# EAGLE board PCB 2D  (EAGLE 9.7.0)
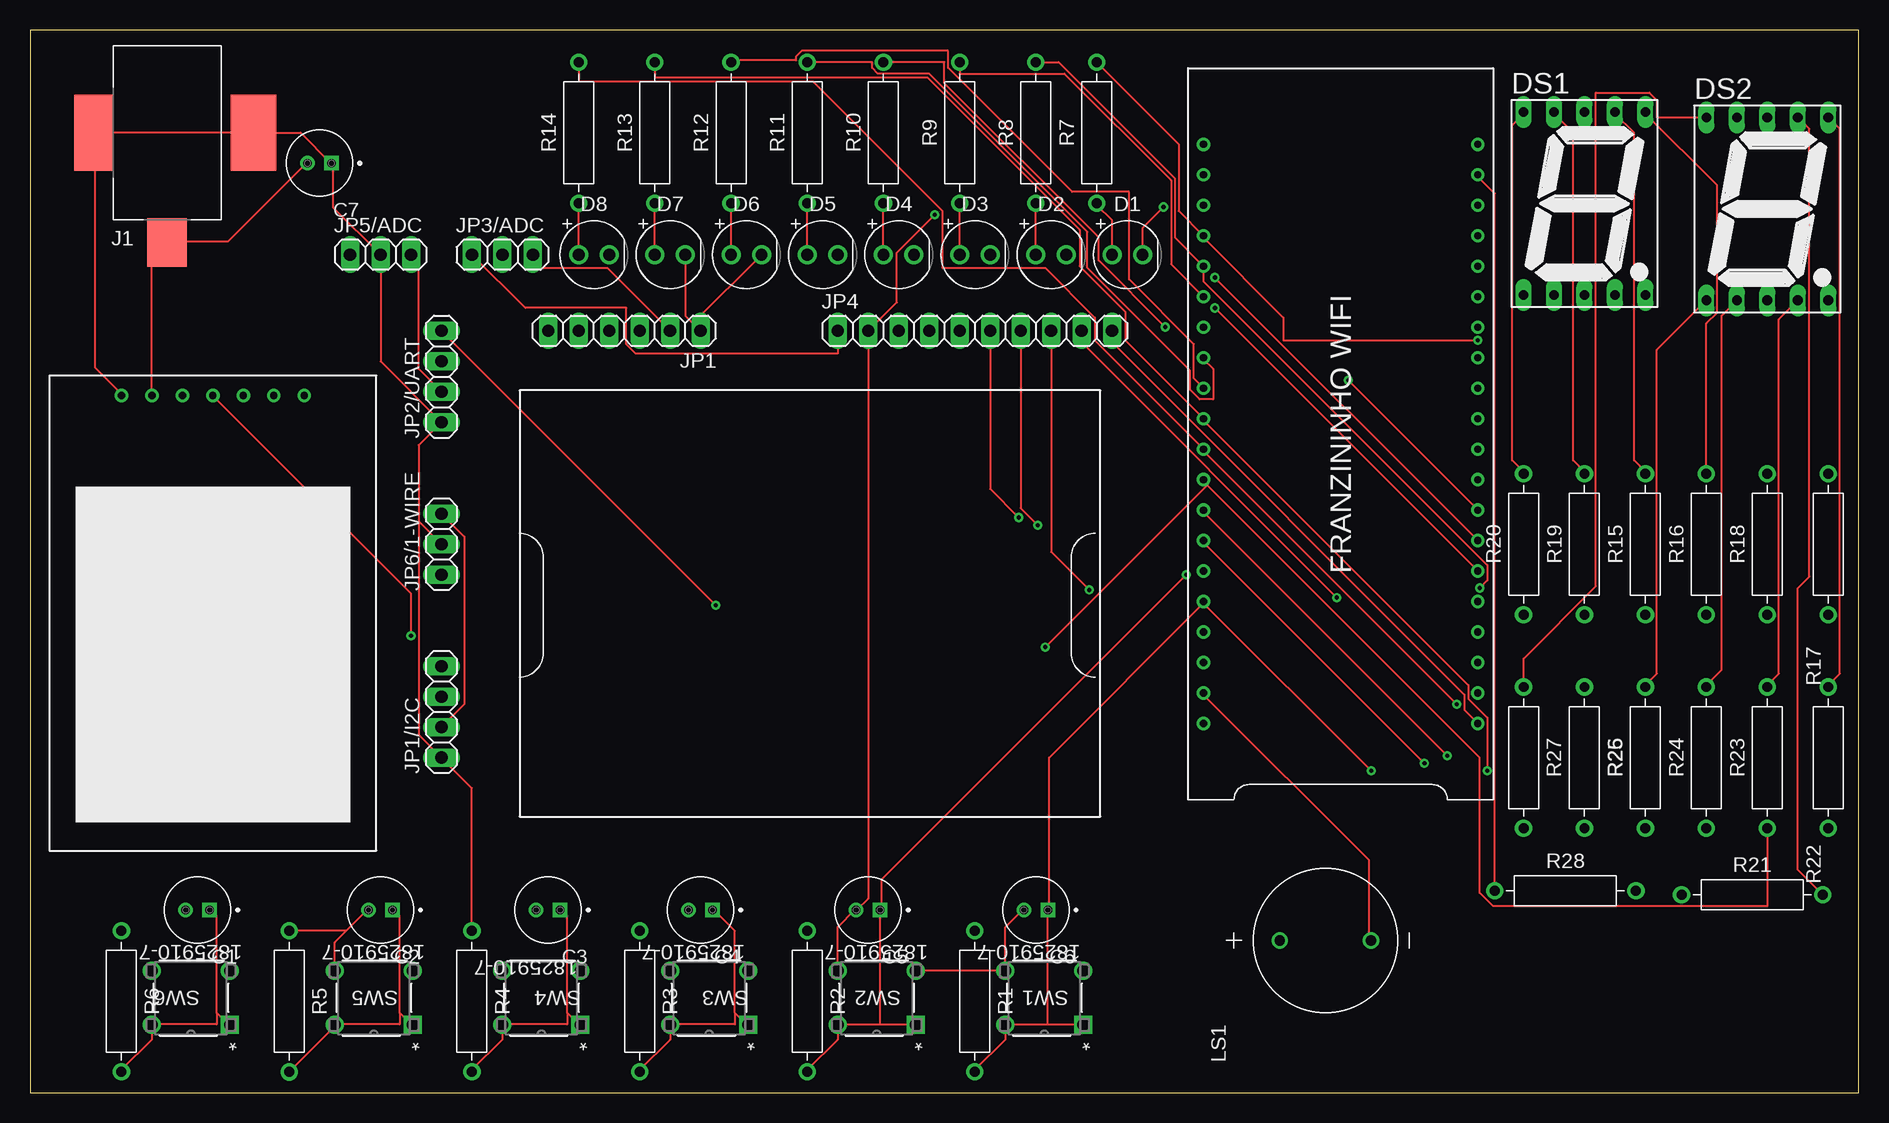
[diagram p0: board, top side]
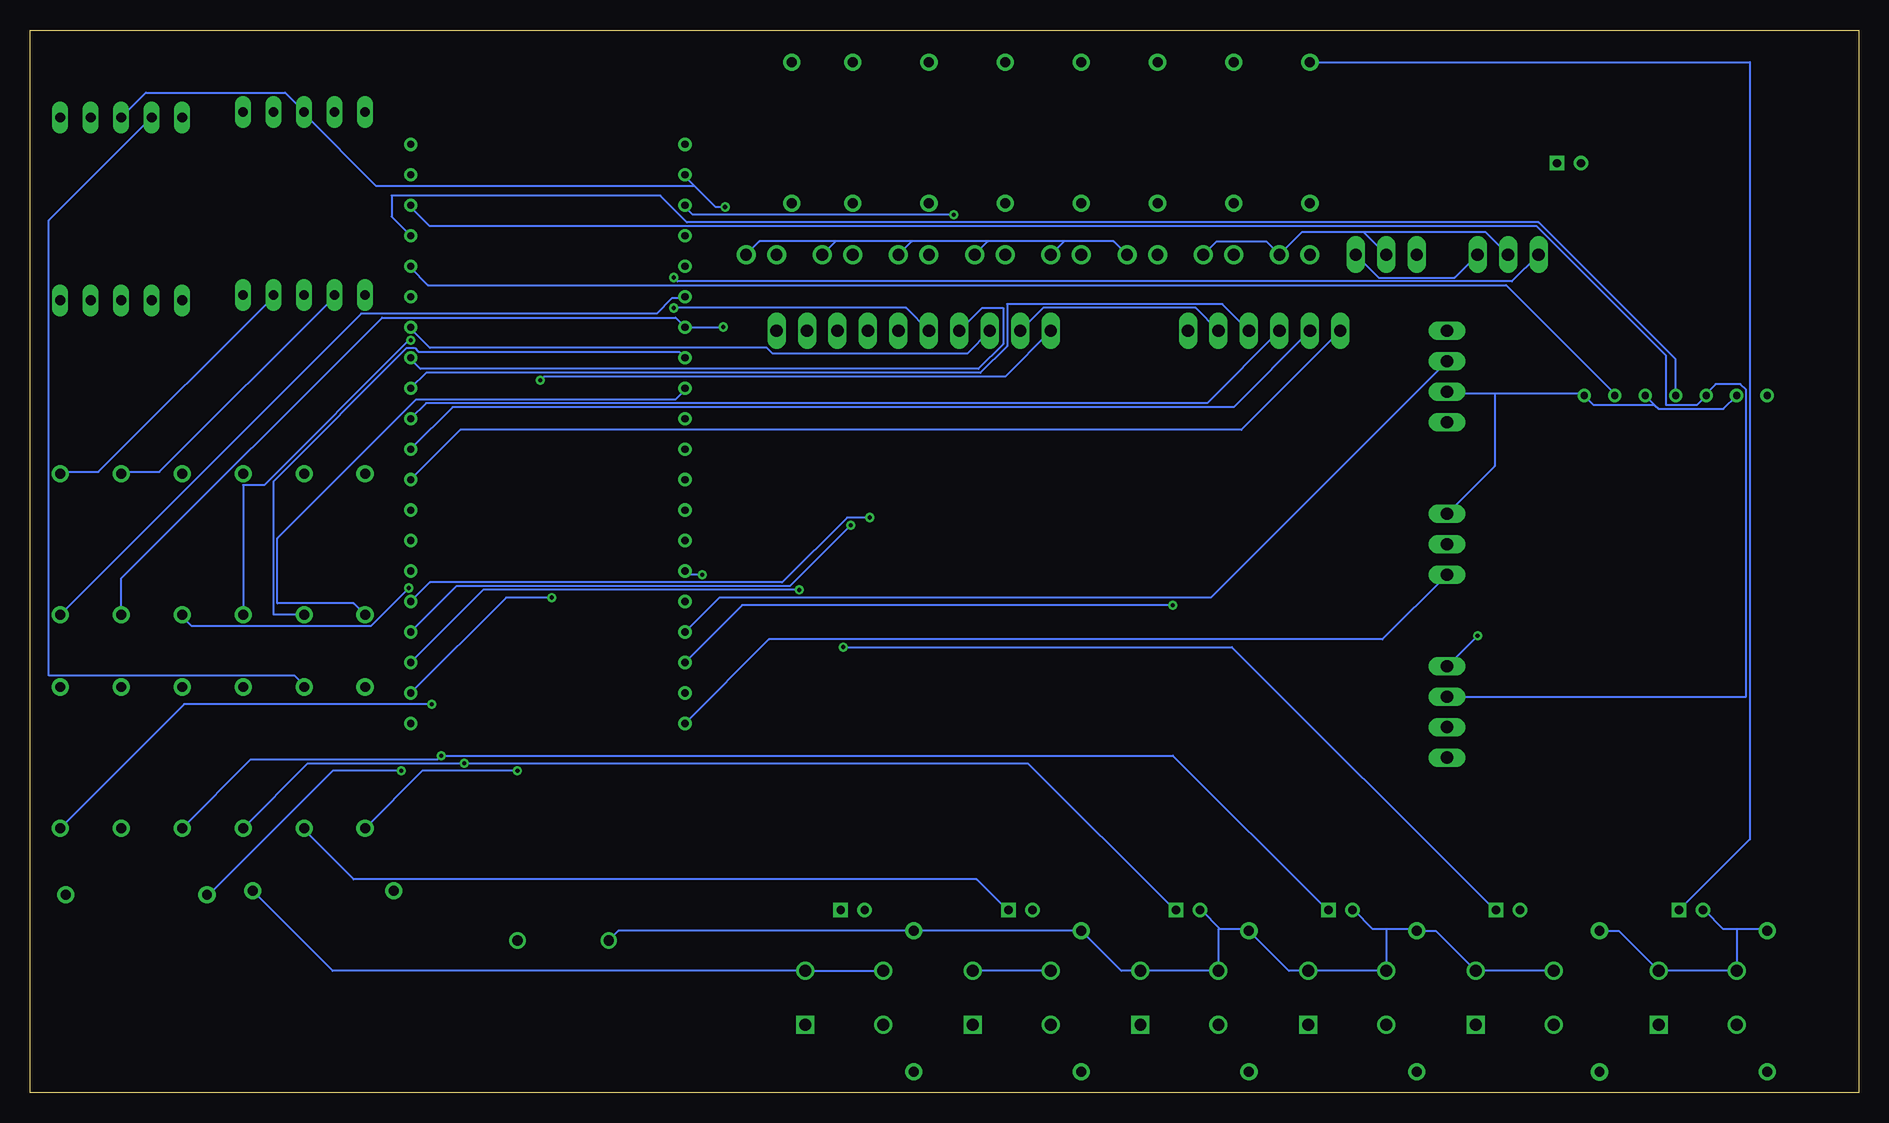
[diagram p1: board, bottom side, seen from below]

Size 152.38 x 88.57 mm. Coordinates in mm from the lower left corner, seen from the top.
Outline: 0,0 152.38,0 152.38,88.57 0,88.57 0,0
Copper layers (1*16): Top / Bottom
Stack-up Default Layer Stack: Top User Defined 0.035mm / Dielectric-1 User Defined 1.5mm / Bottom User Defined 0.035mm
Design rules "default": minimum track width 6mil, minimum drill 0.35mm, track to track 6mil, track to pad 6mil, pad to pad 6mil, via to via 6mil, smd to smd 6mil, copper to edge 40mil, drill to drill 6mil, minimum pad ring 10mil, minimum via ring 8mil, stop-mask expansion 4mil, vias tented up to drill 0mil, thermal gap 10mil

## Footprints (pad centres in the part's own frame; a part is rotated, then mirrored left to right if it is on the bottom)
CAP_RADIAL_2MM = drill 0.7 pad 1.1 square: 1 -1,0 | drill 0.7 pad 1.1: 2 1,0
LEDRD254W60D565H860B_G = drill 0.981 pad 1.581: 1 -1.27,0; 2 1.27,0
7SEG-13 = drill 0.813 long: 1 -5.08,-7.62; 2 -2.54,-7.62; 3 0,-7.62; 4 2.54,-7.62; 5 5.08,-7.62; 6 5.08,7.62; 7 2.54,7.62; 8 0,7.62; 9 -2.54,7.62; 10 -5.08,7.62
RASM722X = smd 3.3 x 4.06: PIN 0,9.14 | smd 3.3 x 6.35: SHUNT 6.1,0 | smd 3.81 x 6.35: SLEEVE -7.19,0
1X06 = drill 1.016 long: 1 -6.35,0; 2 -3.81,0; 3 -1.27,0; 4 1.27,0; 5 3.81,0; 6 6.35,0
1X04 = drill 1.016 long: 1 -3.81,0; 2 -1.27,0; 3 1.27,0; 4 3.81,0
1X03 = drill 1.016 long: 1 -2.54,0; 2 0,0; 3 2.54,0
1X10 = drill 1.016 long: 1 -11.43,0; 2 -8.89,0; 3 -6.35,0; 4 -3.81,0; 5 -1.27,0; 6 1.27,0; 7 3.81,0; 8 6.35,0; 9 8.89,0; 10 11.43,0
XDCR_AI-1223-TWT-12V-R = drill 0.85: N 0,-3.8; P 0,3.8
RESAD1176W63L850D250B = drill 0.83 pad 1.43: 1 -5.88,0; 2 5.88,0
SW4_1825910-B = drill 0.991 pad 1.499 square: 1 -6.502,4.496 | drill 0.991 pad 1.499: 2 0,4.496; 3 -6.502,0; 4 0,0
FRANZININHO-FOOTPRINT = drill 0.6: 3V3 -5.08,-16.51; 5V 17.78,-13.97; GND -5.08,-19.05; GND1 17.78,-19.05; GND2 17.78,-16.51; GPIO0 -5.08,29.21; GPIO1 -5.08,26.67; GPIO2 -5.08,24.13; GPIO3 -5.08,21.59; GPIO4 -5.08,19.05; GPIO5 -5.08,16.51; GPIO6 -5.08,13.97; GPIO7 -5.08,11.43; GPIO8 -5.08,-11.43; GPIO9 -5.08,-13.97; GPIO10 -5.08,8.89; GPIO11 -5.08,6.35; GPIO12 -5.08,3.81; GPIO13 -5.08,1.27; GPIO14 -5.08,-1.27; GPIO15 -5.08,-3.81; GPIO16 -5.08,-6.35; GPIO17 -5.08,-8.89; GPIO18 17.78,-11.43; GPIO21 17.78,-8.89; GPIO26 17.78,-6.35; GPIO33 17.78,-3.81; GPIO34 17.78,-1.27; GPIO35 17.78,1.27; GPIO36 17.78,3.81; GPIO37 17.78,6.35; GPIO38 17.78,8.89; GPIO39 17.78,11.43; GPIO40 17.78,13.97; GPIO41 17.78,16.51; GPIO42 17.78,19.05; GPIO43 17.78,21.59; GPIO44 17.78,24.13; GPIO45 17.78,26.67; GPIO46 17.78,29.21
LED-TFT-FOOTPRINT = drill 0.6: BLK 7.62,17.78; DC 5.08,17.78; GND -7.62,17.78; RES 2.54,17.78; SCL -2.54,17.78; SDA 0,17.78; VCC -5.08,17.78

## Placement (x,y rotation side)
C1  0.1uF  [CAP_RADIAL_2MM]  13.97,15.24 180 top
C2  0.1uF  [CAP_RADIAL_2MM]  29.21,15.24 180 top
C3  0.1uF  [CAP_RADIAL_2MM]  43.18,15.24 180 top
C4  0.1uF  [CAP_RADIAL_2MM]  55.88,15.24 180 top
C5  0.1uF  [CAP_RADIAL_2MM]  69.85,15.24 180 top
C6  0.1uF  [CAP_RADIAL_2MM]  83.82,15.24 180 top
C7  0.1uF  [CAP_RADIAL_2MM]  24.13,77.47 180 top
D1  [LEDRD254W60D565H860B_G]  91.44,69.85 0 top
D2  [LEDRD254W60D565H860B_G]  85.09,69.85 0 top
D3  [LEDRD254W60D565H860B_G]  78.74,69.85 0 top
D4  [LEDRD254W60D565H860B_G]  72.39,69.85 0 top
D5  [LEDRD254W60D565H860B_G]  66.04,69.85 0 top
D6  [LEDRD254W60D565H860B_G]  59.69,69.85 0 top
D7  [LEDRD254W60D565H860B_G]  53.34,69.85 0 top
D8  [LEDRD254W60D565H860B_G]  46.99,69.85 0 top
DS1  7SEG-CA  [7SEG-13]  129.54,74.11 0 top
DS2  7SEG-CA  [7SEG-13]  144.78,73.66 0 top
J1  RASM722  [RASM722X]  11.43,80.01 180 top
JP1  PINHD-1X6  [1X06]  49.53,63.5 180 top
JP1/I2C  PINHD-1X4  [1X04]  34.29,31.75 90 top
JP2/UART  PINHD-1X4  [1X04]  34.29,59.69 90 top
JP3/ADC  PINHD-1X3  [1X03]  39.37,69.85 0 top
JP4  PINHD-1X10  [1X10]  78.74,63.5 0 top
JP5/ADC  PINHD-1X3  [1X03]  29.21,69.85 0 top
JP6/1-WIRE  PINHD-1X3  [1X03]  34.29,45.72 90 top
LS1  AI-1223-TWT-12V-R  [XDCR_AI-1223-TWT-12V-R]  107.95,12.7 90 top
R1  10k  [RESAD1176W63L850D250B]  78.74,7.63 270 top
R2  10k  [RESAD1176W63L850D250B]  64.77,7.63 270 top
R3  10k  [RESAD1176W63L850D250B]  50.8,7.63 270 top
R4  10k  [RESAD1176W63L850D250B]  36.83,7.63 270 top
R5  10k  [RESAD1176W63L850D250B]  21.59,7.62 270 top
R6  10k  [RESAD1176W63L850D250B]  7.62,7.63 270 top
R7  160  [RESAD1176W63L850D250B]  88.9,80.01 90 top
R8  160  [RESAD1176W63L850D250B]  83.82,80.01 90 top
R9  160  [RESAD1176W63L850D250B]  77.47,80.01 90 top
R10  160  [RESAD1176W63L850D250B]  71.12,80.01 90 top
R11  160  [RESAD1176W63L850D250B]  64.77,80.01 90 top
R12  160  [RESAD1176W63L850D250B]  58.42,80.01 90 top
R13  160  [RESAD1176W63L850D250B]  52.07,80.01 90 top
R14  160  [RESAD1176W63L850D250B]  45.72,80.01 90 top
R15  200  [RESAD1176W63L850D250B]  134.62,45.72 90 top
R16  200  [RESAD1176W63L850D250B]  139.7,45.72 90 top
R17  200  [RESAD1176W63L850D250B]  149.86,45.72 90 top
R18  200  [RESAD1176W63L850D250B]  144.78,45.72 90 top
R19  200  [RESAD1176W63L850D250B]  129.54,45.72 90 top
R20  200  [RESAD1176W63L850D250B]  124.46,45.72 90 top
R21  200  [RESAD1176W63L850D250B]  143.51,16.51 0 top
R22  200  [RESAD1176W63L850D250B]  149.86,27.94 90 top
R23  200  [RESAD1176W63L850D250B]  144.78,27.94 90 top
R24  200  [RESAD1176W63L850D250B]  139.7,27.94 90 top
R25  200  [RESAD1176W63L850D250B]  134.62,27.94 90 top
R26  200  [RESAD1176W63L850D250B]  129.54,27.94 270 top
R27  200  [RESAD1176W63L850D250B]  124.46,27.94 270 top
R28  1k  [RESAD1176W63L850D250B]  127.95,16.83 0 top
SW1  1825910-7  [SW4_1825910-B]  81.28,10.16 180 top
SW2  1825910-7  [SW4_1825910-B]  67.31,10.16 180 top
SW3  1825910-7  [SW4_1825910-B]  53.34,10.16 180 top
SW4  1825910-7  [SW4_1825910-B]  39.37,10.16 180 top
SW5  1825910-7  [SW4_1825910-B]  25.4,10.16 180 top
SW6  1825910-7  [SW4_1825910-B]  10.16,10.16 180 top
U$1  FRANZININHO  [FRANZININHO-FOOTPRINT]  115.57,59.99 180 top
U$2  LCD-TFT-1.3-240X240  [LED-TFT-FOOTPRINT]  15.24,40.34 0 top
U$3  PROTOBOARD170  [PROTOBOARD170-FOOTPRINT]  64.77,40.64 90 top

## Library data of the parts
C1-C7 = Resistor_Capacitor; CREATED_BY: PCBLayout.com; DIGIKEY_PART_NUMBER: P5175-ND; MANUFACTURER: Panasonic Electronic Components; MPN: ECA-1HM2R2; PACKAGE: CAP RADIAL 2MM LS
D1-D8 = Library
DS1 DS2 = Opto-Electronic; CATEGORY: Opto-Electronic; SUB-CATEGORY: Display; TYPE: 7-Segment
J1 = Connector; CREATED_BY: PCBLayout.com; DIGI-KEY_PART_NO: RASM722X-ND; MANUFACTURER: Switchcraft Inc.; MPN: RASM722X
JP1 JP1/I2C JP2/UART JP3/ADC JP4 JP5/ADC JP6/1-WIRE = Connector; CATEGORY: CONNECTOR; SUB-CATEGORY: PIN-HEADER
LS1 = AI-1223-TWT-12V-R; MANUFACTURER: PUI Audio; MAXIMUM_PACKAGE_HEIGHT: 9.7 mm; PARTREV: F; STANDARD: IPC 7351B
R1-R28 = Tutorial - Fusion 360; CATEGORY: Resistor; SUB-CATEGORY: Fixed
SW1-SW6 = Switches; BUILT_BY: EMA_UL_Team; CATEGORY: Tactile Switches; CONFIGURATION__POLE-THROW_: Single Pole - Single Throw; COPYRIGHT: Copyright (C) 2016 Accelerated Designs. All rights reserved; DESCRIPTION: FSM4JAH=6MM TACT SWITCH, HIGH TEMP; MANUFACTURER_PART_NUMBER: 1825910-7; MAX_SWITCHING_CURRENT: -; MAX_SWITCHING_VOLTAGE_AC_: -; PART_STATUS: active; PRODUCT_TYPE: Switch; SERIES: Unknown; SWITCH_TYPE: Tactile Switches; TE_PART_NUMBER: 1825910-7; VENDOR: TE Connectivity
U$1 = Franzininho Library
U$2 = LCD Library
U$3 = Protoboard Library

## Nets
GND: C1.2 C2.2 C3.2 C4.2 C7.1 D1.2 D2.2 D3.2 D4.2 D5.2 D6.2 D7.2 D8.2 DS1.8 DS2.8 J1.SHUNT J1.SLEEVE JP1.1 JP1/I2C.1 JP2/UART.1 JP3/ADC.2 JP5/ADC.2 JP6/1-WIRE.2 LS1.P R1.1 R2.1 R3.1 R4.1 R5.1 R6.1 SW3.3 SW3.4 SW4.3 SW4.4 SW5.3 SW5.4 SW6.3 SW6.4 U$1.GND2 U$2.GND
N$1: JP2/UART.4 U$1.GPIO44
N$2: JP2/UART.3 U$1.GPIO43
N$3: D1.1 R7.1
N$4: JP1.6 U$1.GPIO10
N$5: D2.1 R8.1
N$6: JP6/1-WIRE.1 U$1.GPIO46
N$7: JP1/I2C.3 U$1.GPIO9 U$2.SCL
N$8: D3.1 R9.1
N$9: DS2.7 R21.2
N$10: JP1.5 U$1.GPIO11
N$11: JP1.4 U$1.GPIO12
N$12: JP1.3 U$1.GPIO13
N$13: JP5/ADC.1 U$1.GPIO6
N$14: JP3/ADC.1 JP4.1 U$1.GPIO7
N$15: C6.1 R1.2 R27.2 SW1.1 SW1.2 U$1.GPIO42
N$16: D4.1 R10.1
N$17: C4.1 R3.2 R25.1 SW3.1 SW3.2 U$1.GPIO40
N$18: R7.2 R15.1 U$1.GPIO18
N$19: C3.1 R4.2 R24.1 SW4.1 SW4.2 U$1.GPIO39
N$20: R8.2 R16.1 U$1.GPIO21
N$21: C2.1 R5.2 R23.1 SW5.1 SW5.2 U$1.GPIO38
N$22: R9.2 R17.1 U$1.GPIO26
N$23: C1.1 R6.2 R14.2 R22.1 SW6.1 SW6.2 U$1.GPIO37
N$24: R10.2 R18.1 U$1.GPIO33
N$25: R11.2 R19.1 U$1.GPIO34
N$26: R12.2 R20.1 U$1.GPIO35
N$27: R13.2 R21.1 U$1.GPIO36
N$28: C5.2 C6.2 C7.2 J1.PIN JP1.2 JP1/I2C.2 JP2/UART.2 JP3/ADC.3 JP4.2 JP5/ADC.3 JP6/1-WIRE.3 R28.2 SW1.3 SW1.4 SW2.3 SW2.4 U$1.5V U$2.BLK U$2.RES U$2.VCC
N$29: D5.1 R11.1
N$30: D6.1 R12.1
N$31: D7.1 R13.1
N$32: D8.1 R14.1
N$33: C5.1 R2.2 R26.2 SW2.1 SW2.2 U$1.GPIO41
N$34: DS1.7 R15.2
N$35: DS1.6 R16.2
N$36: DS1.4 R17.2
N$37: DS1.2 R18.2
N$38: U$1.GPIO17 U$2.DC
N$39: JP1/I2C.4 U$1.GPIO8 U$2.SDA
N$40: DS1.9 R19.2
N$41: JP4.6 U$1.GPIO4
N$42: DS1.10 R20.2
N$43: DS2.6 R22.2
N$44: DS2.4 R23.2
N$45: DS2.2 R24.2
N$46: DS2.1 R25.2
N$47: DS2.9 R26.1
N$48: DS2.10 R27.1
N$49: LS1.N U$1.GPIO45
N$50: JP4.10 U$1.GPIO0
N$51: JP4.9 U$1.GPIO1
N$52: JP4.8 U$1.GPIO2
N$53: JP4.7 U$1.GPIO3
N$54: JP4.5 U$1.GPIO5
N$55: JP4.4 U$1.GPIO14
N$56: JP4.3 U$1.GPIO15
N$57: R28.1 U$1.3V3

## Tracks (layer width: path | path; a pad name or v marks a point on that pad's centre or on a via)
GND  (via drill 0.35)
  Top 0.152: 26.35,13.49 25.4,12.54 SW5.4 | 26.35,13.49 28.1,15.24 C2.2 | 26.35,13.49 R5.1 | R4.1 36.83,25.4 JP1/I2C.1 32.39,29.85 32.39,47.62 | 5.4,80.01 5.4,60.48 7.62,58.26 U$2.GND | 32.39,47.62 JP6/1-WIRE.2 | 32.39,47.62 32.39,53.98 JP2/UART.1 29.21,60.96 JP5/ADC.2 25.24,73.82 25.24,77.47 C7.1 25.08,77.47 22.54,80.01 J1.SLEEVE 5.4,80.01 | 5.4,80.01 J1.SHUNT | v94.46,73.82 92.71,72.07 D1.2 | 55.24,64.14 54.61,64.77 D7.2 | 55.24,64.14 D6.2 | 55.24,64.14 JP1.1
  Bottom 0.152: 10.16,13.65 7.62,13.65 R6.1 | 10.16,13.65 11.27,13.65 12.86,15.24 C1.2 | 10.16,13.65 SW6.4 SW6.3 20,13.49 R5.1 | SW5.4 SW5.3 35.24,13.49 36.83,13.49 R4.1 36.83,13.65 39.37,13.65 | 78.74,13.49 103.35,13.49 LS1.P | 64.77,13.49 61.44,10.16 SW3.3 SW3.4 53.34,13.65 53.18,13.65 | 53.18,13.65 54.77,15.24 C4.2 | 53.18,13.65 50.8,13.65 R3.1 50.8,13.49 47.47,10.16 SW4.3 SW4.4 39.37,13.65 | 39.37,13.65 40.48,13.65 42.07,15.24 C3.2 | 64.77,13.49 78.74,13.49 | 78.74,13.49 R1.1 | 64.77,13.49 R2.1 | DS2.8 142.72,83.34 131.13,83.34 129.54,81.76 DS1.8 129.54,81.6 123.51,75.56 97,75.56 | 97,75.56 95.25,73.82 v94.46,73.82 | 97,75.56 97.79,76.36 U$1.GND2 | 41.28,71.75 JP3/ADC.2 | 41.28,71.75 46.36,71.75 D8.2 49.37,70.96 53.5,70.96 D7.2 | 66.2,70.96 D5.2 | 66.2,70.96 62.07,70.96 D6.2 | 72.55,70.96 D4.2 | 66.2,70.96 72.55,70.96 | 78.9,70.96 D3.2 | 72.55,70.96 78.9,70.96 | 85.25,70.96 D2.2 | 78.9,70.96 85.25,70.96 | D1.2 91.6,70.96 85.25,70.96 | JP5/ADC.2 31.11,71.75 41.28,71.75
N$1  (via drill 0.35)
  Top 0.152: JP2/UART.4 v57.15,40.64
  Bottom 0.152: v57.15,40.64 93.03,40.64 97.79,35.88 U$1.GPIO44
N$2
  Bottom 0.152: JP2/UART.3 53.97,41.28 94.93,41.28 97.79,38.42 U$1.GPIO43
N$3
  Top 0.152: D1.1 90.17,72.71 88.9,73.98 R7.1
N$4
  Bottom 0.152: JP1.6 51.44,55.25 116.52,55.25 120.65,51.12 U$1.GPIO10
N$5
  Top 0.152: D2.1 R8.1
N$6
  Bottom 0.152: JP6/1-WIRE.1 39.69,37.78 90.8,37.78 97.79,30.8 U$1.GPIO46
N$7
  Bottom 0.152: JP1/I2C.3 9.37,33.02 9.37,58.58 9.84,59.05 11.91,59.05 12.7,58.26 U$2.SCL 12.7,58.1 13.49,57.31 16.03,57.31 16.03,61.44 26.83,72.23 119.06,72.23 120.65,73.82 U$1.GPIO9
N$8
  Top 0.152: D3.1 R9.1
N$9
  Top 0.152: DS2.7 148.27,80.33 148.27,43.02 147.32,42.07 147.32,18.57 R21.2
N$10
  Bottom 0.152: JP1.5 52.07,57.15 117.16,57.15 120.65,53.66 U$1.GPIO11
N$11
  Bottom 0.152: JP1.4 54.29,57.47 119.38,57.47 120.65,56.2 U$1.GPIO12
N$12
  Bottom 0.152: JP1.3 53.02,65.72 70.96,65.72 70.96,62.23 73.18,60.01 119.38,60.01 120.65,58.74 U$1.GPIO13
N$13  (via drill 0.35)
  Top 0.152: v98.74,67.95 120.65,46.04 U$1.GPIO6
  Bottom 0.152: v98.74,67.95 98.42,67.63 28.89,67.63 JP5/ADC.1
N$14  (via drill 0.35)
  Top 0.152: v109.86,59.37 120.65,48.58 U$1.GPIO7 | JP3/ADC.1 41.28,65.41 49.69,65.41 49.69,62.39 50.48,61.59 67.31,61.59 JP4.1
  Bottom 0.152: v109.86,59.37 109.54,59.69 71.12,59.69 JP4.1
N$15  (via drill 0.35)
  Top 0.152: R1.2 78.74,1.91 81.28,4.45 SW1.2 81.28,5.72 84.77,5.72 | 84.77,5.72 87.63,5.72 SW1.1 | 97.79,40.8 84.93,27.94 84.93,15.24 C6.1 84.77,15.24 84.77,5.72 | 97.79,40.8 v111.76,26.83 | 97.79,40.8 U$1.GPIO42
  Bottom 0.152: v111.76,26.83 119.7,26.83 R27.2
N$16
  Top 0.152: D4.1 R10.1
N$17  (via drill 0.35)
  Top 0.152: R3.2 50.8,1.91 53.34,4.45 SW3.2 53.34,5.72 58.74,5.72 58.74,6.67 | 58.74,6.67 58.74,13.49 56.99,15.24 C4.1 | 58.74,6.67 59.69,5.72 SW3.1 | v116.2,27.46 97.79,45.88 U$1.GPIO40
  Bottom 0.152: R25.1 129.22,27.46 v116.2,27.46 69.22,27.46 56.99,15.24 C4.1
N$18  (via drill 0.35)
  Top 0.152: R7.2 95.73,79.06 95.73,73.5 97.79,71.44 U$1.GPIO18 97.79,71.28 104.46,64.61 104.46,62.71 v120.65,62.71
  Bottom 0.152: R15.1 134.62,50.64 132.87,50.64 120.81,62.71 v120.65,62.71
N$19  (via drill 0.35)
  Top 0.152: R4.2 36.83,1.91 39.37,4.45 SW4.2 39.37,5.72 44.77,5.72 44.77,6.67 | 44.77,6.67 44.77,14.76 44.29,15.24 C3.1 | 44.77,6.67 45.72,5.72 SW4.1 | v118.11,28.1 97.79,48.42 U$1.GPIO39
  Bottom 0.152: R24.1 133.99,27.78 118.43,27.78 v118.11,28.1 57.15,28.1 44.29,15.24 C3.1
N$20  (via drill 0.35)
  Top 0.152: R8.2 85.72,85.88 95.41,76.2 95.41,71.28 97.79,68.9 U$1.GPIO21 97.79,67.63 121.44,43.97 121.44,42.7 v120.81,42.07
  Bottom 0.152: v120.81,42.07 123.98,38.89 138.91,38.89 139.7,39.69 R16.1
N$21  (via drill 0.35)
  Top 0.152: R5.2 25.4,5.56 SW5.2 25.4,5.72 30.8,5.72 30.8,6.67 | 30.8,6.67 30.8,14.76 30.32,15.24 C2.1 | 30.8,6.67 31.75,5.72 SW5.1 | 98.11,50.64 120.81,27.94 120.81,16.67 121.92,15.56 144.78,15.56 R23.1 | 98.11,50.64 97.79,50.96 U$1.GPIO38 98.11,50.64 | 98.11,50.64 v84.61,37.15
  Bottom 0.152: v84.61,37.15 52.23,37.15 30.32,15.24 C2.1
N$22
  Top 0.152: R9.2 77.47,84.93 86.2,84.93 95.09,76.04 95.09,69.06 97.79,66.36 U$1.GPIO26
  Bottom 0.152: R17.1 124.78,64.93 100.17,64.93 98.9,66.2 97.79,66.2 U$1.GPIO26
N$23  (via drill 0.35)
  Top 0.152: R6.2 7.62,1.91 10.16,4.45 SW6.2 10.16,5.72 15.56,5.72 15.56,6.67 | 15.56,6.67 15.56,14.76 15.08,15.24 C1.1 | 15.56,6.67 16.51,5.72 SW6.1 | R14.2 45.72,84.3 65.25,84.3 76.04,73.5 76.04,68.74 84.61,68.74 88.74,64.61 88.74,62.71 97.79,53.66 U$1.GPIO37 97.79,53.5 v118.9,32.39
  Bottom 0.152: v118.9,32.39 139.54,32.39 R22.1 | C1.1 14.92,15.24 9.05,21.11 9.05,85.88 R14.2
N$24  (via drill 0.35)
  Top 0.152: v94.61,63.82 89.06,69.37 89.06,71.28 76.2,84.14 76.2,85.88 R10.2
  Bottom 0.152: 97.79,63.82 98.58,64.61 123.03,64.61 144.78,42.86 R18.1 | 97.79,63.82 v94.61,63.82 | 97.79,63.82 U$1.GPIO33
N$25
  Top 0.152: R11.2 70.17,85.88 70.17,85.41 70.64,84.93 74.93,84.93 88.11,71.75 88.11,68.74 96.68,60.17 96.68,58.58 97.47,57.79 98.58,57.79 98.58,60.33 97.79,61.12 U$1.GPIO34
  Bottom 0.152: U$1.GPIO34 97.79,61.28 98.27,61.75 120.02,61.75 120.33,62.07 120.97,62.07 132.08,50.96 132.08,39.85 R19.1
N$26
  Top 0.152: R12.2 58.42,86.04 63.82,86.04 63.82,86.36 64.29,86.84 76.52,86.84 76.52,85.41 86.84,75.09 91.6,75.09 91.6,67.79 97,62.39 97,59.53 97.79,58.74 U$1.GPIO35
  Bottom 0.152: U$1.GPIO35 97.79,58.58 98.58,57.79 120.17,57.79 131.76,46.2 131.76,40.8 125.41,40.8 R20.1
N$27  (via drill 0.35)
  Top 0.152: R13.2 52.07,84.61 74.77,84.61 87.47,71.91 87.47,68.9 91.28,65.09 91.28,62.71 97.79,56.2 U$1.GPIO36 97.79,56.04 119.86,33.97 119.86,32.86 121.44,31.27 v121.44,26.83
  Bottom 0.152: v121.44,26.83 127.16,26.83 137.48,16.51 R21.1
N$28  (via drill 0.35)
  Top 0.152: SW2.4 67.31,13.81 68.74,15.24 C5.2 68.9,15.24 69.85,16.19 JP4.2 72.23,65.88 72.23,70.01 v75.41,73.18 | C6.2 82.71,15.24 81.28,13.81 SW1.4 SW2.3 | JP1.2 48.1,68.74 41.91,68.74 JP3/ADC.3 | C7.2 23.02,77.47 16.51,70.96 11.43,70.96 J1.PIN 11.43,70.8 10.16,69.53 U$2.VCC | JP1/I2C.2 36.2,32.39 36.2,46.36 JP6/1-WIRE.3 | JP5/ADC.3 32.39,69.22 32.39,60.33 JP2/UART.2
  Bottom 0.152: SW2.4 SW2.3 | R28.2 127.16,10.16 SW1.3 SW1.4 | v75.41,73.18 97.16,73.18 97.79,73.82 U$1.5V | JP5/ADC.3 33.66,67.95 40,67.95 JP3/ADC.3 | 16.99,57.31 17.78,58.1 U$2.RES | 16.99,57.31 16.67,56.99 11.27,56.99 10.16,58.1 U$2.VCC | 16.99,57.31 22.07,57.31 22.86,58.1 U$2.BLK 22.86,58.26 30.32,58.26 | JP2/UART.2 34.13,58.26 30.32,58.26 | JP6/1-WIRE.3 30.32,52.23 30.32,58.26 | JP4.2 67.94,65.41 55.24,65.41 JP1.2
N$29
  Top 0.152: D5.1 R11.1
N$30
  Top 0.152: D6.1 R12.1
N$31
  Top 0.152: D7.1 R13.1
N$32
  Top 0.152: D8.1 R14.1
N$33  (via drill 0.35)
  Top 0.152: R2.2 64.77,1.91 67.31,4.45 SW2.2 67.31,5.72 70.8,5.72 | 70.8,5.72 73.66,5.72 SW2.1 | v96.36,43.18 70.96,17.78 70.96,15.24 C5.1 70.8,15.24 70.8,5.72
  Bottom 0.152: v96.36,43.18 97.63,43.18 97.79,43.34 U$1.GPIO41 | R26.2 129.54,21.91 125.41,17.78 73.5,17.78 70.96,15.24 C5.1
N$34
  Top 0.152: DS1.7 132.08,81.6 133.67,80.01 133.67,52.7 134.62,51.75 R15.2
N$35
  Top 0.152: DS1.6 134.62,81.6 140.59,75.63 140.59,65.01 139.7,64.12 R16.2
N$36
  Bottom 0.152: DS1.4 132.08,66.36 146.69,51.75 149.86,51.75 R17.2
N$37
  Bottom 0.152: DS1.2 127,66.36 141.61,51.75 144.78,51.75 R18.2
N$38
  Bottom 0.152: U$2.DC 20.32,58.26 29.37,67.31 119.22,67.31 120.65,68.74 U$1.GPIO17
N$39  (via drill 0.35)
  Top 0.152: v31.75,38.1 31.75,41.59 15.24,58.1 U$2.SDA
  Bottom 0.152: JP1/I2C.4 v31.75,38.1 | U$2.SDA 15.24,61.12 26.67,72.55 97.63,72.55 99.85,74.77 122.24,74.77 122.24,73.03 120.65,71.44 U$1.GPIO8
N$40
  Top 0.152: DS1.9 127,81.6 128.59,80.01 128.59,52.7 129.54,51.75 R19.2
N$41  (via drill 0.35)
  Top 0.152: v82.39,47.94 80.01,50.32 JP4.6
  Bottom 0.152: v82.39,47.94 84.3,47.94 89.69,42.55 119.06,42.55 120.65,40.96 U$1.GPIO4
N$42
  Top 0.152: DS1.10 124.46,81.6 123.51,80.65 123.51,52.7 124.46,51.75 R20.2
N$43
  Top 0.152: DS2.6 150.81,80.33 150.81,34.92 149.86,33.97 R22.2
N$44
  Top 0.152: DS2.4 145.73,64.45 145.73,34.92 144.78,33.97 R23.2
N$45
  Top 0.152: DS2.2 140.97,64.77 140.97,35.24 139.7,33.97 R24.2
N$46
  Top 0.152: DS2.1 135.57,61.91 135.57,34.92 134.62,33.97 R25.2
N$47
  Bottom 0.152: DS2.9 150.81,72.71 150.81,34.77 130.33,34.77 129.54,33.97 R26.1
N$48
  Top 0.152: DS2.10 135.57,81.28 135.57,82.71 134.94,83.34 130.49,83.34 130.49,42.23 124.46,36.2 R27.1
N$49
  Top 0.152: U$1.GPIO45 97.79,33.18 111.6,19.37 111.6,12.7 LS1.N
N$50
  Top 0.152: JP4.10 90.17,62.55 119.54,33.18 119.54,31.91 120.65,30.8 U$1.GPIO0
N$51  (via drill 0.35)
  Top 0.152: v108.9,41.28 87.63,62.55 JP4.9
  Bottom 0.152: v108.9,41.28 112.71,41.28 120.65,33.34 U$1.GPIO1
N$52  (via drill 0.35)
  Top 0.152: v88.27,41.91 85.09,45.09 JP4.8
  Bottom 0.152: v88.27,41.91 114.62,41.91 120.65,35.88 U$1.GPIO2
N$53  (via drill 0.35)
  Top 0.152: v83.98,47.31 82.55,48.74 JP4.7
  Bottom 0.152: v83.98,47.31 89.06,42.23 116.84,42.23 120.65,38.42 U$1.GPIO3
N$54  (via drill 0.35)
  Top 0.152: v98.74,65.41 120.65,43.5 U$1.GPIO5
  Bottom 0.152: v98.74,65.41 79.38,65.41 JP4.5
N$55
  Bottom 0.152: JP4.4 73.02,65.41 71.28,65.41 71.28,62.39 73.34,60.33 119.86,60.33 120.65,61.12 U$1.GPIO14
N$56
  Bottom 0.152: JP4.3 74.3,61.59 90.49,61.59 90.96,62.07 119.06,62.07 120.65,63.66 U$1.GPIO15
N$57
  Top 0.152: U$1.3V3 120.65,76.36 122.08,74.93 122.08,16.99 R28.1